# EAGLE board UVC-LED-board (EAGLE 6.4)
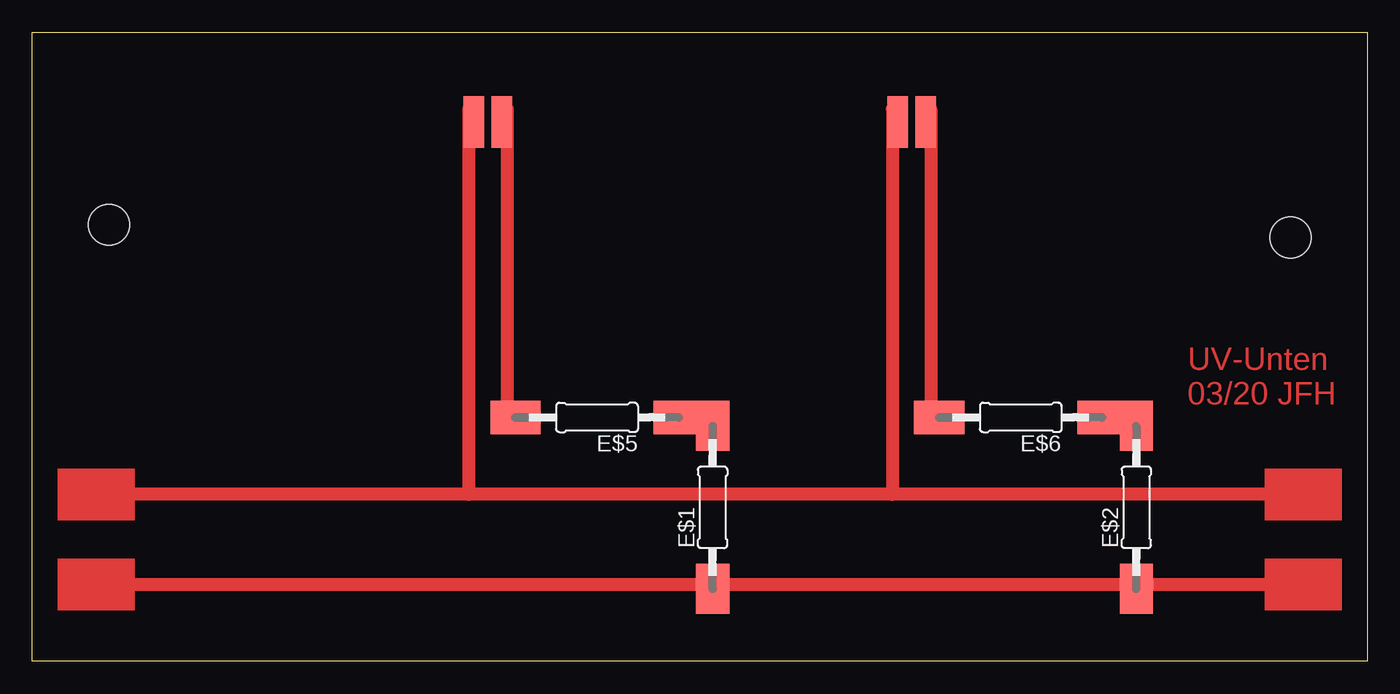
[diagram p0: board, top side]
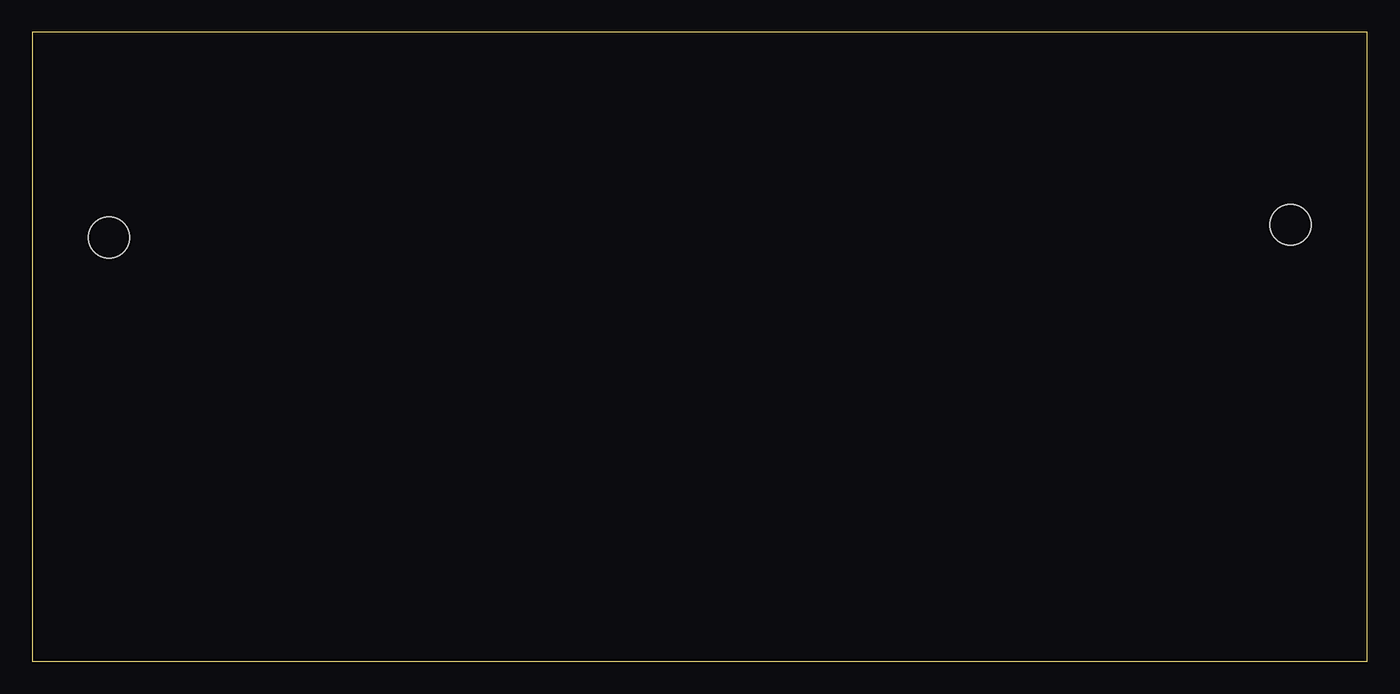
[diagram p1: board, bottom side, seen from below]

Size 104 x 49 mm. Coordinates in mm from the lower left corner, seen from the top.
Outline: 0,0 0,49 104,49 104,0 0,0
Copper layers (1*16): Top 0.035mm / dielectric 1.5mm / Bottom 0.035mm
Design rules "default": minimum track width 10mil, minimum drill 24mil, track to track 8mil, track to pad 8mil, pad to pad 8mil, via to via 8mil, smd to smd 8mil, copper to edge 40mil, drill to drill 8mil, minimum pad ring 10mil, minimum via ring 8mil, stop-mask expansion 4mil, vias tented up to drill 0mil, thermal gap 10mil
Holes 3.2 mm at 98,33 6,34

## Footprints (pad centres in the part's own frame; a part is rotated, then mirrored left to right if it is on the bottom)
0207/12-SMD = smd 3.9 x 2.6: P$1 -6.35,0; P$2 6.35,0
FLAT = smd 1.6 x 4: P$1 1.1,0; P$2 -1.1,0

## Placement (x,y rotation side)
E$1  3R3  [0207/12-SMD]  53,12 90 top
E$2  3R3  [0207/12-SMD]  86,12 90 top
E$3  [FLAT]  35.5,42 0 top
E$4  [FLAT]  68.5,42 0 top
E$5  3R3  [0207/12-SMD]  44,19 180 top
E$6  3R3  [0207/12-SMD]  77,19 180 top

## Library data of the parts
E$1 E$2 E$5 E$6 = rcl
E$3 E$4 = led

## Tracks (layer width: path | path; a pad name or v marks a point on that pad's centre or on a via)
S$2
  Top 1.016: 34,43 34,13 | 34,13 5,13 | 99,13 67,13 | 67,13 34,13 | 67,43 67,13
S$3
  Top 1.016: 37,43 37,20
S$4
  Top 1.016: 5,6 100,6
S$5
  Top 1.016: 70,43 70,20
S$6  (via drill 0.6)
  other vias: 6,34
S$9  (via drill 0.6)
  other vias: 98,33
(copper drawn outside any net)
  shapes: Top area x4

## Text on the board
Top: UV-Unten / 03/20 JFH